# Altium PCB Notecarier-F.PcbDoc (part 3 of 3)
Units mm, origin at the board's own origin, x right, y up, seen from the top; angles counter-clockwise.
Board outline 50.8 x 103 mm, 4 copper layers (Top Layer, Mid Layer 3, Mid Layer 4, Bottom Layer), stack 1.58 mm thick; 102 components, 110 nets, 555 pads, 589 vias.
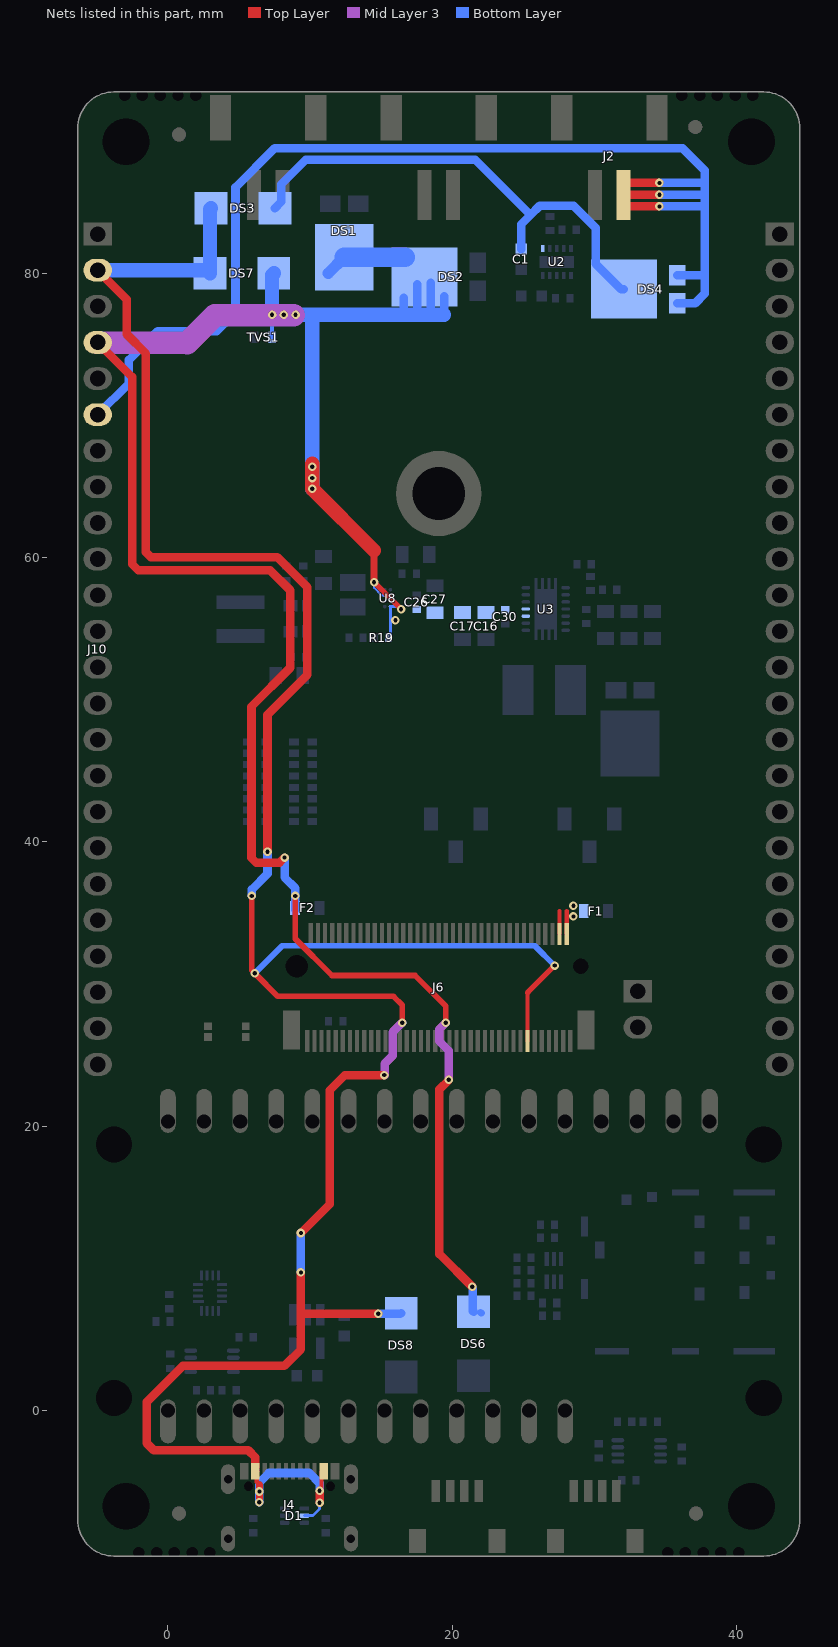
[diagram p5: the nets of this part, all layers, seen from the top]

## Via types
v1: diameter 0.6, hole 0.3, Top Layer to Bottom Layer, tented both sides, 589 vias

## Nets (pads, with @x,y where several pads share a name; then routed paths per layer and width w, separated by ;. In a path a pad name is that pad's centre, name@x,y a point inside that pad or via, vN(x,y) a via of type N, cw(c..) or ccw(c..) an arc to the next point about the centre after c; other vN are vias at no path point) (continued)
VBUS: C1.2 DS3.1 DS4.3 U2.1 | length 35.2
  Bottom Layer w0.6: DS3.1@7.525,84.585 7.984,85.044 7.984,86.284 9.7,88 21.605,88 25.502,84.102 ; C1.2@24.845,81.71 24.845,83.445 25.502,84.102 ; DS4.3@32.075,78.885 31.875,78.885 30.1,80.66 30.1,83.2 28.54,84.76 26.16,84.76 25.502,84.102
VIO_P: F1.2 J6.2 J6.4 | length 3.2
  Top Layer w0.3: J6.4@27.55,33.535 27.55,35.135 ; J6.2@28.05,33.535 28.05,35.135
  other v1: 28.525,34.76 28.525,35.51
VMAIN: C16.2 C17.2 C26.2 C27.2 C30.2 DS1.3 DS2.3 DS6.1 DS7.1 F2.1 J10.4 R19.2 TVS1.2 U3.10 U3.11 U8.A2 U8.C1 | length 167.1
  Top Layer w0.4: v1(8.95,36.2) 8.95,33.185 11.535,30.6 17.385,30.6 19.55,28.435 v1(19.55,27.285) ; v1(14.5,58.275) v1(16.4,56.375)
  Top Layer w0.5: v1(14.5,58.275) 14.5,60.5
  Top Layer w0.6: J10.4@-4.95,75.14 -2.525,72.715 -2.525,59.55 -2.075,59.1 7.2,59.1 8.6,57.7 8.6,52.25 5.875,49.525 5.875,38.875 6.2,38.55 7.85,38.55 v1(8.2,38.9) ; v1(19.76,23.26) 19.095,22.595 19.095,11.005 v1(21.4,8.7)
  Top Layer w1: v1@10.15,66.6 v1(10.15,64.85) 14.5,60.5
  Mid Layer 3 w0.6: v1(19.55,27.285) 19.1,26.835 19.1,25.96 19.76,25.3 v1(19.76,23.26)
  Mid Layer 3 w1.6: J10.4@-4.95,75.14 1.356,75.105 3.299,77.048 v1@8.85,77.048
  Bottom Layer w0.15: v1(14.5,58.275) 14.5,57.875 15.025,57.35 U8.C1@15.25,57.35
  Bottom Layer w0.2: R19.2@15.65,54.5 U8.A2@15.65,56.55 v1@16.45,56.55
  Bottom Layer w0.3: TVS1.2@7.325,75.5 v1(7.325,77.08)
  Bottom Layer w0.5: v1(8.15,77.08) 8.15,77.053 v1@8.225,76.978 ; DS6.1@21.995,6.9 DS6.1@22.035,6.86
  Bottom Layer w0.6: v1(8.2,38.9) 8.2,37.5 8.95,36.75 F2.1@8.95,35.235 ; 16.575,77.08 DS2.3@16.575,78.285 ; 17.525,77.08 DS2.3@17.525,79.235 ; 18.475,77.08 DS2.3@18.475,79.335 ; 19.425,77.08 DS2.3@19.425,78.385 ; v1(21.4,8.7) 21.451,8.649 21.451,6.999 DS6.1@21.5,6.95
  Bottom Layer w0.8: DS1.3@11.265,80 DS1.3@12.4,81.135
  Bottom Layer w1: v1(7.325,77.08) 7.325,79.875 DS7.1@7.45,80 ; v1@7.45,77.08 v1(8.15,77.08) v1(8.975,77.08) 10.15,77.08 v1(10.15,64.85) ; 10.3,77.08 15.4,77.08 19.425,77.08
  Bottom Layer w1.4: DS1.3@12.4,81.135 DS2.3@16.675,81.135
  other v1: 16,55.6 10.15,65.6 10.15,66.4
VSOLAR: DS4.1 DS4.2 J2.2 J10.6 | length 86.9
  Top Layer w0.6: J2.2@32.075,84.71 v1(34.575,84.71) ; J2.2@32.075,85.535 v1(34.575,85.535) ; J2.2@32.075,86.36 v1(34.575,86.36)
  Bottom Layer w0.6: J10.6@-4.95,70.06 -2.75,72.26 -2.75,73.91 -0.725,75.935 3.425,75.935 4.75,77.26 4.75,86.05 7.5,88.8 36.2,88.8 37.75,87.25 37.75,86.393 ; v1(34.575,84.71) 37.75,84.71 ; v1(34.575,85.535) 37.675,85.535 ; v1(34.575,86.36) 37.718,86.36 37.75,86.393 ; DS4.1@35.825,77.9 37.09,77.9 37.75,78.56 37.75,86.393 ; DS4.2@35.825,79.87 37.64,79.87
VUSB: D1.5 DS3.2 DS7.2 DS8.1 J4.A4 J4.A9 J4.B4 J4.B9 J6.13 J10.2 | length 187.9
  Top Layer w0.3: J4.B9@6.3,-4.267 6.243,-4.324 6.243,-5.032 6.425,-5.214 6.425,-5.224 ; v1(10.665,-5.654) 10.8,-5.519 J4.B4@10.8,-4.267 ; J6.13@25.3,25.985 25.3,29.397
  Top Layer w0.4: v1(5.9,36.2) 5.9,30.96 v1(6.1,30.76) 7.725,29.135 15.865,29.135 16.475,28.525 v1(16.475,27.285) ; 25.3,29.397 v1(27.203,31.3)
  Top Layer w0.5: v1@6.435,-6.44 v1(6.435,-5.7) 6.435,-5.224
  Top Layer w0.6: J10.2@-4.95,80.22 -2.9,78.17 -2.9,75.71 -1.55,74.36 -1.55,60.375 -1.2,60.025 7.7,60.025 9.8,57.925 9.8,51.75 7,48.95 v1(7,39.3) ; J4.A4@6.15,-4 6.15,-3.3 5.65,-2.8 -1,-2.8 -1.5,-2.3 -1.5,0.6 1.035,3.135 8.185,3.135 9.35,4.3 9.35,6.8 ; v1(9.35,9.71) 9.35,6.8 ; v1(9.35,12.485) 11.365,14.5 11.365,22.515 12.45,23.6 v1(15.213,23.6) ; v1(10.665,-6.5) v1(10.665,-5.654) ; v1(14.8,6.8) 9.35,6.8
  Mid Layer 3 w0.6: v1(15.213,23.6) 15.25,23.6 15.25,24.4 15.8,24.95 15.8,26.61 v1(16.475,27.285)
  Bottom Layer w0.2: D1.5@9.6,-7.4 10.2,-7.4 10.658,-6.942 10.658,-6.507 v1(10.665,-6.5)
  Bottom Layer w0.4: v1(6.1,30.76) 8.04,32.7 25.803,32.7 v1(27.203,31.3)
  Bottom Layer w0.6: v1(5.9,36.2) 5.9,36.66 7,37.76 v1(7,39.3) ; v1@6.435,-6.44 v1(6.435,-5.7) 6.435,-5.065 7.1,-4.4 9.95,-4.4 10.665,-5.115 v1(10.665,-5.654) ; v1(9.35,9.71) v1(9.35,12.485) ; v1(14.8,6.8) 16.35,6.8 DS8.1@16.4,6.85
  Bottom Layer w1: J10.2@-4.95,80.22 2.73,80.22 DS7.2@2.95,80 2.95,84.51 DS3.2@3.025,84.585
  other v1: 6.425,-6.45
pads on no net: FD1.1 FD2.1 FD3.1 FD4.1 FD5.1 FD6.1 FD7.1 FD8.1 J1.M J2.M J3.M J4.0 J4.A8 J4.B8 J5.6 J6. J6.1 J6.15 J6.17 J6.19 J6.21 J6.23 J6.24 J6.25 J6.26 J6.27 J6.28 J6.29 J6.30 J6.31 J6.35 J6.37 J6.44 J6.53 J6.55 J6.59 J6.61 J6.63 J6.66 J6.68 J6.69 J6.75 J6.AH J7.M J8.M SW1.3 U2.9 U3.14 U8.D2 U9.4

## Polygon pours and split planes (outlines as drawn)
GND on Top Layer "Top Layer-GND" (solid, remove dead copper, pour order 38): -6.35,-10.24 44.45,-10.24 44.45,64.5 -6.35,64.5
VUSB on Top Layer "VUSB" (solid, remove dead copper, pour order 37): 5.852,-4.841 6.15,-5.089 6.15,-5.74 6.65,-5.74 6.85,-5.74 6.85,-5.04 6.55,-5.04 6.4,-4.74
GND on Bottom Layer "Bottom Layer-GND" (solid, remove dead copper, pour order 39): -6.35,-10.24 44.45,-10.24 44.45,64.5 -6.35,64.5
GND on Mid Layer 4 "Mid Layer 4-GND" (solid, remove dead copper, pour order 41): -6.35,-10.24 44.45,-10.24 44.45,92.76 -6.35,92.76
GND on Mid Layer 3 "Mid Layer 3-GND" (solid, remove dead copper, pour order 40): -6.35,-10.24 44.45,-10.24 44.45,92.76 -6.35,92.76

## Keep-outs
Keep-Out Layer:
  circle w0.2: c41.05,-6.74 r1.9
  circle w0.2: c-2.95,-6.74 r1.9
  circle w0.2: c-3.804,0.876 r1.5
  circle w0.2: c41.05,89.26 r1.9
  circle w0.2: c-2.95,89.26 r1.9
  circle w0.2: c41.916,18.72 r1.5
  circle w0.2: c41.916,0.876 r1.5
  circle w0.2: c-3.81,18.72 r1.5
  circle w0.2: c9.05,31.26 r0.8
  circle w0.2: c29.05,31.26 r0.55
  lines w0.2: -6.35,-7.7 ccw(c-3.81,-7.7) -3.81,-10.24 41.91,-10.24 ccw(c41.91,-7.7) 44.45,-7.7 44.45,90.22 ccw(c41.91,90.22) 41.91,92.76 -3.81,92.76 ccw(c-3.81,90.22) -6.35,90.22 -6.35,-7.7

## Other copper
Top Layer:
  region net VIO_P: 28.825,35.81 27.353,35.81 27.353,34.46 28.825,34.46
Bottom Layer:
  rectangle net NetF2_2: 10.3,35.585 10.975,36.435
  region net VIO_P: 29.725,35.81 28.225,35.81 28.225,34.46 29.725,34.46
  region net 1V8: 13.3,58.8 10.525,58.8 10.525,57.675 13.3,57.675
  rectangle net F_BAT: 31.5,43.035 33.6,45.585
  rectangle net NetC22_1: 31,51.585 35.9,52.485
  region net VBUS: 26.3,81.6 26.3,81.9 25.1,81.9 25.1,81.6
  pour cut-out: 13.9,58.8 12.1,58.8 12.1,55.95 13.9,55.95
  pour cut-out: 23.662,48.685 29.487,48.685 29.487,52.385 23.662,52.385
  region net VMAIN: 25.475,56.535 23.65,56.535 23.25,56.95 18.9,56.95 18.675,56.725 18.675,55.16 21.675,55.16 22.275,55.76 25.475,55.76
  region net GND: 25.885,54.96 27.265,54.96 27.265,54.305 27.775,53.795 27.775,52.71 25.375,52.71 25.375,53.795 25.885,54.305
  region net NetL2_2: 25.525,55.56 25.525,54.36 25.075,53.91 25.075,48.96 23.425,48.96 23.425,54.585 23.575,54.735 24.2,54.735 24.4,54.935 24.4,55.56
  region net NetL2_1: 27.625,55.56 27.625,54.36 28.075,53.91 28.075,48.96 29.575,48.96 29.575,54.735 28.95,54.735 28.75,54.935 28.75,55.56
  region net NetC22_1: 27.675,56.535 28.46,56.535 29.059,57.134 35.9,57.1 35.9,52.41 35.05,52.41 35.05,55.185 30.45,55.185 29.85,55.785 27.675,55.785
  region net VMAIN: 15.55,54.93 15.55,56.1 15.85,56.1 16.075,56.325 16.075,56.725 19.675,56.725 19.675,55.16 19.445,54.93
  region net NetL3_2: 12.1,54.975 12.1,57.1 13.9,57.1 13.9,56.625 14.8,56.625 14.8,56.381 15.081,56.1 15.35,56.1 15.35,54.975
  region net 1V8: 12.1,57.675 12.1,59.105 12.475,59.48 12.475,60.825 16.975,60.825 16.975,59.395 16.605,59.025 14.275,59.025 13.9,58.65 13.9,57.675
  region net NetL1_1: 3.037,55 6.525,55 7.125,55.6 7.8,55.6 7.8,54.1 7.35,53.65 3.037,53.65
  region net 1V8: 3.037,56.35 6.525,56.35 7.1,55.775 7.8,55.775 7.8,57.7 3.037,57.7
  region net GND: 9.15,52.675 9.15,54.1 8.1,54.1 7.425,53.425 6.375,53.425 6.375,52.675
  region net 1V8: 11.725,57.625 11.725,59.125 10.425,59.125 9.975,58.675 8.775,58.675 8.775,57.625
  region net N_VIO: 11.725,57.325 10.07,57.325 10.07,54.27 9.9,54.1 9.3,54.1 9.3,52.413 9.3,49.1 11.725,49.1
  pour cut-out: 6.725,57.475 2.825,57.475 2.825,53.875 6.725,53.875
Multi-Layer:
  pour cut-out: 19.05,64.535 19.05,92.76 44.45,92.76 44.45,64.535

## Silkscreen, mask and mechanical layers (free items; w line width, h text height)
Top Overlay:
  drawing of 7 lines, arcs and shapes, not listed
  text "+" at 9.35,84.86 h3 r270
  text "+" at 21.35,84.86 h3 r270
  text "+" at 33.35,84.86 h3 r270
  text "-" at 3.35,83.46 h3
  text "-" at 15.35,83.46 h3
  text "-" at 27.35,83.46 h3
  text "F_3V3" at -3.125,82.235 h2.29
  text "F_NRST" at 35.402,82.192 h2.29
  text "V+" at 3.475,81.675 h2.29
  text "VBAT" at 15.4,81.675 h2.29
  text "SOLAR" at 27.475,81.675 h2.29
  text "VUSB" at -3.098,79.662 h2.29
  text "F_EN" at 37.45,79.62 h2.29
  text "SDA" at 38.075,77.08 h2.29
  text "VBAT" at -3.098,77.048 h2.29
  text "NOTECARRIER-F" at 8.275,76.225 h4
  text "VMAIN" at -3.098,74.508 h2.29
  text "SCL" at 38.275,74.455 h2.29
  text "V1.5" at 16.517,74.066 h4
  text "F_D5" at 37.598,72.038 h2.29
  text "N_VIO" at -3.098,71.969 h2.29
  text "F_D6" at 37.601,69.491 h2.29
  text "VSOLAR" at -3.1,69.429 h2.29
  text "F_D9" at 37.628,66.953 h2.29
  text "V+" at -3.098,66.888 h2.29
  text "F_D10" at 36.974,64.414 h2.29
  text "GND" at -3.125,64.385 h2.29
  text "F_D11" at 37.352,61.873 h2.29
  text "N_EN" at -3.098,61.818 h2.29
  text "F_D12" at 36.98,59.325 h2.29
  text "N_NRST" at -3.098,59.302 h2.29
  text "F_D13" at 37.019,56.799 h2.29
  text "N_BOOT" at -3.098,56.764 h2.29
  text "F_B0" at 37.566,54.254 h2.29
  text "N_SCL" at -3.098,54.222 h2.29
  text "F_TX" at 37.495,51.713 h2.29
  text "N_SDA" at -3.098,51.682 h2.29
  text "F_RX" at 37.446,49.173 h2.29
  text "N_ATTN" at -3.098,49.143 h2.29
  text "F_MISO" at 35.88,46.644 h2.29
  text "AUX_EN" at -3.1,46.609 h2.29
  text "F_MOSI" at 35.904,44.094 h2.29
  text "AUX_RX" at -3.1,44.069 h2.29
  text "F_SCK" at 36.444,41.552 h2.29
  text "AUX_TX" at -3.1,41.529 h2.29
  text "F_A5" at 37.509,39.018 h2.29
  text "AUX1" at -3.1,38.989 h2.29
  text "F_A4" at 37.422,36.473 h2.29
  text "AUX2" at -3.1,36.442 h2.29
  text "F_A3" at 37.525,33.939 h2.29
  text "AUX3" at -3.1,33.909 h2.29
  text "AUX4" at -3.1,31.369 h2.29
  text "F_A2" at 37.487,31.385 h2.29
  text "RTX" at 31.7,30.985 h1.8
  text "F_A1" at 37.858,28.853 h2.29
  text "N_RX" at -3.098,28.823 h2.29
  text "F_A0" at 37.48,26.314 h2.29
  text "N_TX" at -3.098,26.283 h2.29
  text "CTX" at 31.7,24.085 h1.8
  text "F_AREF" at 35.429,23.773 h2.29
  text "GND" at -3.125,23.735 h2.29
  text "N_NRST" at 1.5,23.66 h1.8
  text "F_B0" at -0.691,17.92 h2.29 r270
  text "F_TX" at 1.849,17.92 h2.29 r270
  text "F_RX" at 4.398,17.92 h2.29 r270
  text "F_MISO" at 6.929,17.92 h2.29 r270
  text "F_MOSI" at 9.469,17.92 h2.29 r270
  text "F_SCK" at 12.009,17.92 h2.29 r270
  text "F_A5" at 14.549,17.92 h2.29 r270
  text "F_A4" at 17.089,17.92 h2.29 r270
  text "F_A3" at 19.629,17.92 h2.29 r270
  text "F_A2" at 22.169,17.92 h2.29 r270
  text "F_A1" at 24.709,17.92 h2.29 r270
  text "F_A0" at 27.249,17.92 h2.29 r270
  text "GND" at 29.789,17.92 h2.29 r270
  text "F_AREF" at 32.338,17.92 h2.29 r270
  text "F_3V3" at 34.869,17.92 h2.29 r270
  text "F_NRST" at 37.418,17.92 h2.29 r270
  text "F_SDA" at -0.691,8.069 h2.29 r270
  text "F_SCL" at 1.849,7.067 h2.29 r270
  text "F_BAT" at 27.258,7.02 h2.29 r270
  text "F_D5" at 4.389,6.839 h2.29 r270
  text "F_D10" at 12.009,6.728 h2.29 r270
  text "F_D11" at 14.549,6.728 h2.29 r270
  text "F_D13" at 19.629,6.729 h2.29 r270
  text "VUSB" at 22.169,6.729 h2.29 r270
  text "F_D12" at 17.089,6.723 h2.29 r270
  text "F_EN" at 24.718,6.569 h2.29 r270
  text "F_D6" at 6.929,5.656 h2.29 r270
  text "F_D9" at 9.469,5.656 h2.29 r270
  text "NOTECARD USB" at -5.1,-4.325 h1.6
  text "QWIIC" at 18.65,-4.34 h1.6
  text "QWIIC" at 28.35,-4.34 h1.6
Bottom Overlay:
  lines w0.2: 34.525,25.685 31.525,25.685 31.525,30.785 34.525,30.785 ; 34.575,25.685 34.575,30.785
  text "V+" at 11.091,89.25 h2
  text "VBAT" at 23.056,89.25 h2
  text "SOLAR" at 34.594,89.25 h2
  text "2.5V - 5.5V" at 11.091,87.375 h2
  text "3.3V - 4.2V" at 23.056,87.375 h2
  text "3.5V - 7V" at 34.594,87.375 h2
  text "F_3V3" at 1.375,82.235 h2.29
  text "F_NRST" at 41.198,82.192 h2.29
  text "VUSB" at 0.925,79.635 h2.29
  text "F_EN" at 41.2,79.61 h2.29
  text "SDA" at 41.15,77.08 h2.29
  text "VBAT" at 1.001,77.048 h2.29
  text "VMAIN" at 1.682,74.508 h2.29
  text "SCL" at 41.125,74.455 h2.29
  text "F_D5" at 41.198,72.038 h2.29
  text "N_VIO" at 1.242,71.969 h2.29
  text "F_D6" at 41.198,69.491 h2.29
  text "VSOLAR" at 3.025,69.44 h2.29
  text "F_D9" at 41.198,66.953 h2.29
  text "V+" at -1.335,66.888 h2.29
  text "F_D10" at 41.198,64.414 h2.29
  text "GND" at -0.125,64.385 h2.29
  text "F_D11" at 41.198,61.873 h2.29
  text "N_EN" at 0.788,61.818 h2.29
  text "F_D12" at 41.198,59.325 h2.29
  text "N_NRST" at 2.875,59.302 h2.29
  text "F_D13" at 41.198,56.799 h2.29
  text "N_BOOT" at 2.853,56.764 h2.29
  text "F_B0" at 41.198,54.254 h2.29
  text "N_SCL" at 1.729,54.222 h2.29
  text "F_TX" at 41.198,51.713 h2.29
  text "N_SDA" at 1.912,51.682 h2.29
  text "F_RX" at 41.198,49.173 h2.29
  text "N_ATTN" at 2.899,49.143 h2.29
  text "F_MISO" at 41.198,46.634 h2.29
  text "AUX_EN" at 2.972,46.609 h2.29
  text "F_MOSI" at 41.198,44.094 h2.29
  text "AUX_RX" at 3.017,44.069 h2.29
  text "F_SCK" at 41.198,41.552 h2.29
  text "AUX_TX" at 2.967,41.529 h2.29
  text "F_A5" at 41.198,39.018 h2.29
  text "AUX1" at 0.599,38.989 h2.29
  text "N_ATTN" at 16.05,36.725 h1.6 r270
  text "FEATHER_EN" at 23.05,36.725 h1.2
  text "ON" at 23.204,36.725 h1.6 r270
  text "ACTIVE" at 25.45,36.725 h1.6 r270
  text "GPS ANT." at 32.45,36.725 h1.6
  text "PASSIVE" at 32.604,36.725 h1.6 r270
  text "F_A4" at 41.198,36.473 h2.29
  text "AUX2" at 0.97,36.442 h2.29
  text "F_A3" at 41.198,33.939 h2.29
  text "AUX3" at 0.932,33.909 h2.29
  text "AUX4" at 1.035,31.369 h2.29
  text "F_A2" at 41.198,31.385 h2.29
  text "RTX" at 34.4,30.985 h1.8
  text "F_A1" at 41.198,28.853 h2.29
  text "N_RX" at 0.832,28.823 h2.29
  text "F_A0" at 41.198,26.314 h2.29
  text "N_TX" at 0.783,26.283 h2.29
  text "CTX" at 34.4,24.11 h1.8
  text "F_AREF" at 41.198,23.773 h2.29
  text "GND" at -0.125,23.735 h2.29
  text "SIM" at 34.05,15.86 h3
Top Paste:
  rectangle: 31.3,83.51 32.8,87.26
  rectangle: 29.3,83.51 30.8,87.26
  rectangle: 19.3,83.51 20.8,87.26
  rectangle: 17.3,83.51 18.8,87.26
  rectangle: 7.3,83.51 8.8,87.26
  rectangle: 5.3,83.51 6.8,87.26
M4 Enclosure:
  lines w0.2: -3.3,92.76 ccw(c-3.3,93.76) -3.3,94.76 ; -2.3,-12.24 ccw(c-2.3,-11.24) -2.3,-10.24 ; 2.2,92.76 cw(c2.2,93.76) 2.2,94.76 ; 3.2,-12.24 cw(c3.2,-11.24) 3.2,-10.24 ; 34.9,-12.24 ccw(c34.9,-11.24) 34.9,-10.24 ; 35.9,92.76 ccw(c35.9,93.76) 35.9,94.76 ; 40.4,-12.24 cw(c40.4,-11.24) 40.4,-10.24 ; 41.4,92.76 cw(c41.4,93.76) 41.4,94.76 ; -8.35,-7.7 ccw(c-3.81,-7.7) -3.81,-12.24 41.91,-12.24 ccw(c41.91,-7.7) 46.45,-7.7 46.45,90.22 ccw(c41.91,90.22) 41.91,94.76 -3.81,94.76 ccw(c-3.81,90.22) -8.35,90.22 -8.35,-7.7 ; -6.35,-7.7 ccw(c-3.81,-7.7) -3.81,-10.24 41.91,-10.24 ccw(c41.91,-7.7) 44.45,-7.7 44.45,90.22 ccw(c41.91,90.22) 41.91,92.76 -3.81,92.76 ccw(c-3.81,90.22) -6.35,90.22 -6.35,-7.7
M11 Gerber Spec:
  drawing of 235 lines, arcs and shapes, not listed
  text "PCB requirements" at 121.805,115.525 h1
  text "List of Gerber files" at 165.205,115.525 h1
  text "Parameter" at 119.305,112.525 h1
  text "Value" at 138.405,112.525 h1
  text "File" at 158.105,112.525 h1
  text "No." at 151.805,111.525 h1
  text "Description" at 170.605,111.525 h1
  text "Generated" at 187.205,111.525 h1
  text "extension" at 155.805,110.425 h1
  text "Material" at 108.405,109.525 h1
  text "FR-4 (Tg 140)" at 131.405,109.525 h1
  text "Number of layers" at 108.405,106.525 h1
  text "4" at 131.405,106.525 h1
  text "1." at 152.005,106.525 h1
  text "GTP" at 158.705,106.525 h1
  text "Top Solder Paste" at 165.705,106.525 h1
  text "Board thickness" at 108.405,103.525 h1
  text "1.6 (±0.1) mm" at 131.405,103.525 h2.2
  text "2." at 152.005,103.525 h1
  text "GTO" at 158.705,103.525 h1
  text "Top Overlay (Silk)" at 165.705,103.525 h1
  text "Solder mask" at 108.405,100.525 h1
  text "Black" at 131.405,100.525 h1
  text "3." at 152.205,100.525 h1
  text "GTS" at 158.705,100.525 h1
  text "Top Solder Mask" at 165.705,100.525 h1
  text "HAL (with lead)" at 134.705,97.525 h1
  text "4." at 152.205,97.525 h1
  text "GTL" at 158.705,97.525 h1
  text "Top Layer" at 165.705,97.525 h1
  text "Surface finishing" at 108.405,94.525 h1
  text "HAL (lead-free)" at 134.705,94.525 h1
  text "5." at 152.205,94.525 h1
  text "G1" at 158.705,94.525 h1
  text "Mid Layer 1" at 165.705,94.525 h1
  text "ENIG" at 134.705,91.525 h1
  text "6." at 152.205,91.525 h1
  text "G2" at 158.705,91.525 h1
  text "Mid Layer 2" at 165.705,91.525 h1
  text "other:" at 134.705,88.525 h1
  text "7." at 152.205,88.525 h1
  text "GBL" at 158.705,88.525 h1
  text "Bottom Layer" at 165.705,88.525 h1
  text "Silkscreen top" at 108.405,85.525 h1
  text "White" at 131.405,85.525 h1
  text "8." at 152.205,85.525 h1
  text "GBS" at 158.705,85.525 h1
  text "Bottom Solder Mask" at 165.705,85.525 h1
  text "Silkscreen bottom" at 108.405,82.525 h1
  text "White" at 131.405,82.525 h1
  text "9." at 152.205,82.525 h1
  text "GBO" at 158.705,82.525 h1
  text "Bottom Overlay (Silk)" at 165.705,82.525 h1
  text "Min. track/spacing" at 108.405,79.525 h1
  text "0.15 mm" at 131.405,79.525 h1
  text "10." at 152.205,79.525 h1
  text "GBP" at 158.705,79.525 h1
  text "Bottom Solder Paste" at 165.705,79.525 h1
  text "Min. hole size" at 108.405,76.525 h1
  text "0.3 mm" at 131.405,76.525 h1
  text "11." at 152.205,76.525 h1
  text "GM10" at 158.705,76.525 h1
  text "Bottom PSM" at 165.705,76.525 h1
  text "Board dimension" at 108.405,73.525 h1
  text "103x50.8 (±0.2) mm" at 131.405,73.525 h2.2
  text "12." at 152.205,73.525 h1
  text "GM15" at 158.705,73.525 h1
  text "Board Layer" at 165.705,73.525 h1
  text "Panelization" at 108.405,70.525 h1
  text "No" at 131.405,70.525 h1
  text "13." at 152.205,70.525 h1
  text "GM8" at 158.705,70.525 h1
  text "Milling" at 165.705,70.525 h1
  text "RoHS compatibility" at 108.405,67.525 h1
  text "Yes" at 131.405,67.525 h1
  text "14." at 152.205,67.525 h1
  text "GM9" at 158.705,67.525 h1
  text "V-Cut" at 165.705,67.525 h1
  text "Number of Gerber Files" at 108.405,64.525 h1
  text "15" at 131.405,64.525 h1
  text "15." at 152.205,64.525 h1
  text "TXT" at 158.705,64.525 h1
  text "Round holes" at 165.705,64.525 h1
  text "16." at 152.205,61.525 h1
  text "TXT" at 158.705,61.525 h1
  text "Slot holes" at 165.705,61.525 h1
  text "17." at 152.205,58.525 h1
  text "TX1" at 158.705,58.525 h1
  text "Round holes" at 165.705,58.525 h1
  text "18." at 152.205,55.525 h1
  text "DRR" at 158.705,55.525 h1
  text "NCDrill file report" at 165.705,55.525 h1
  text "19." at 152.205,52.525 h1
  text "GM11" at 158.705,52.525 h1
  text "Gerbers Specification" at 165.705,52.525 h1
  text "20." at 152.205,49.525 h1
  text "GM16" at 158.705,49.525 h1
  text "Sheet Top" at 165.705,49.525 h1
  text "Additional requests" at 118.405,37.075 h1
  text "Via in pad" at 127.405,34.075 h1
  text "Half holes/castellated edges" at 127.405,31.075 h1
  text "Plated edge" at 127.405,28.075 h1
  text "Impedance control" at 127.405,25.075 h1
  text "Blind vias" at 127.405,22.075 h1
  text "Other:" at 127.405,17.575 h1
  text "Layer stack up details" at 141.005,5.875 h1
  text "Copper" at 139.405,2.875 h1
  text "Dielectric" at 149.205,2.875 h1
  text "Dielectric" at 162.205,2.875 h1
  text "Dielectric" at 174.505,2.875 h1
  text "Layer name" at 121.405,1.875 h1
  text "thickness" at 137.705,0.475 h1
  text "height" at 151.005,0.475 h1
  text "material" at 163.105,0.475 h1
  text "type" at 177.405,0.475 h1
  text "Top Layer (GTL)" at 118.405,-6.125 h1
  text "0.035 mm" at 138.205,-6.125 h1
  text "0.1 mm" at 150.905,-9.125 h1
  text "FR-4" at 164.005,-9.125 h1
  text "Prepreg" at 176.005,-9.125 h1
  text "Mid Layer 1 (G1)" at 118.405,-12.125 h1
  text "0.0175 mm" at 138.205,-12.125 h1
  text "1.265 mm" at 150.905,-15.125 h1
  text "FR-4" at 164.005,-15.125 h1
  text "Core" at 176.005,-15.125 h1
  text "Mid Layer 2 (G2)" at 118.405,-18.125 h1
  text "0.0175 mm" at 138.205,-18.125 h1
  text "0.1 mm" at 150.905,-21.125 h1
  text "FR-4" at 164.005,-21.125 h1
  text "Prepreg" at 176.005,-21.125 h1
  text "Bottom Layer (GBL)" at 118.405,-24.125 h1
  text "0.035 mm" at 138.205,-24.125 h1
  text "Gerber specification" at 137.4,-40.025 h1.52
  text "PART NO.:" at 123.52,-50.67 h1.14
  text ".PCB_Num" at 136.9,-51.775 h1.52
M13 Assy Top Comm:
  text "Assembly drawing comments - TOP" at 137.4,-39.925 h1.52
  text "BOM NO.:" at 123.52,-50.67 h1.14
  text ".PCBA_BOM_Num" at 136.9,-51.775 h1.52
M14 Assy Bot Comm:
  text "Assembly drawing comments - BOTTOM" at -22.475,-40.015 h1.52
  text ".PCBA_BOM_Num" at -21.975,-51.765 h1.52
M15 Board Outline:
  the board outline again, w0.2
M16 Sheet Top:
  drawing of 42 lines, arcs and shapes, not listed
  text "1" at -52.354,121.146 h1.78
  text "2" at 20.29,121.146 h1.78
  text "3" at 93.442,121.146 h1.78
  text "4" at 166.34,121.146 h1.78
  text "This document is the exclusive property of Byte Lab Grupa d.o.o. Company and it should not be distributed or" at -81.738,116.193 h1.52
  text "reproduced into any other format without prior permission from Byte Lab Grupa d.o.o." at -81.357,112.764 h1.52
  text "A" at -86.695,98.134 h1.78
  text "A" at 200.325,98.134 h1.78
  text "B" at -86.695,50.077 h1.78
  text "B" at 200.325,50.077 h1.78
  text "C" at -86.695,1.563 h1.78
  text "C" at 200.23,1.563 h1.78
  text "SIGNATURE" at 99.125,-35.265 h1.14
  text "TITLE:" at 123.495,-35.455 h1.14
  text "AUTHOR:" at 85.125,-39.365 h1.14
  text ".PCB_Author" at 99.125,-39.408 h1.52
  text "ACCEPTOR:" at 85.125,-44.315 h1.14
  text ".PCB_Acceptor" at 99.125,-44.315 h1.52
  text "D" at -86.695,-46.443 h1.78
  text "D" at 200.23,-46.443 h1.78
  text "Byte Lab Grupa d.o.o." at 58.975,-53.935 h1.65
  text "Medarska 69/1" at 58.975,-56.475 h1.65
  text "FORMAT:" at 176.835,-58.315 h1.14
  text "10000 Zagreb" at 58.975,-59.015 h1.65
  text "DESIGN DOCUMENT / NAME:" at 85.268,-59.942 h1.14
  text "'.HW_E_Doc_Num' '.Module_Name' Rev. '.HW_E_Doc_Rev'" at 102.125,-60.265 h1.52
  text "A4" at 185.375,-60.515 h1.52
  text "Croatia" at 58.975,-61.555 h1.65
  text "1" at -52.354,-66.814 h1.78
  text "2" at 20.29,-66.814 h1.78
  text "3" at 93.442,-66.814 h1.78
  text "4" at 166.34,-66.814 h1.78
Drill Drawing:
  circle w0.254: c-85.768,174.387 r0.733
  lines w0.254: -86.501,140.662 -85.768,141.028 -85.034,140.662 -85.401,141.395 -85.034,142.128 -85.768,141.761 -86.501,142.128 -86.134,141.395 -86.501,140.662 ; -86.501,145.427 -85.034,145.427 -85.768,143.961 -86.501,145.427 ; -86.501,150.926 -86.134,150.926 -86.134,150.559 -85.401,150.559 -85.401,150.926 -85.034,150.926 -85.034,151.659 -85.401,151.659 -85.401,152.026 -86.134,152.026 -86.134,151.659 -86.501,151.659 -86.501,150.926 ; -86.501,157.158 -86.501,157.524 -86.134,157.891 -86.501,158.257 -86.501,158.624 -86.134,158.624 -85.768,158.257 -85.401,158.624 -85.034,158.624 -85.034,158.257 -85.401,157.891 -85.034,157.524 -85.034,157.158 -85.401,157.158 -85.768,157.524 -86.134,157.158 -86.501,157.158 ; -86.501,160.823 -86.134,160.823 -85.768,160.457 -85.401,160.823 -85.034,160.823 -85.401,161.19 -85.034,161.557 -85.401,161.557 -85.768,161.923 -86.134,161.557 -86.501,161.557 -86.134,161.19 -86.501,160.823 ; -86.501,164.123 -86.134,164.123 -86.134,163.756 -85.401,163.756 -85.401,164.123 -85.034,164.123 -85.034,164.856 -85.401,164.856 -85.401,165.222 -86.134,165.222 -86.134,164.856 -86.501,164.856 -86.501,164.123 ; -86.501,167.055 -85.034,167.055 -85.034,168.522 -86.501,168.522 -86.501,167.055 ; -86.501,170.354 -85.768,170.721 -85.034,170.354 -85.401,171.088 -85.034,171.821 -85.768,171.454 -86.501,171.821 -86.134,171.088 -86.501,170.354 ; -86.208,140.955 -85.768,141.175 -85.328,140.955 -85.548,141.395 -85.328,141.835 -85.768,141.615 -86.208,141.835 -85.988,141.395 -86.208,140.955 ; -86.208,151.072 -85.988,151.072 -85.988,150.852 -85.548,150.852 -85.548,151.072 -85.328,151.072 -85.328,151.512 -85.548,151.512 -85.548,151.732 -85.988,151.732 -85.988,151.512 -86.208,151.512 -86.208,151.072 ; -86.208,157.451 -86.208,157.671 -85.988,157.891 -86.208,158.111 -86.208,158.331 -85.988,158.331 -85.768,158.111 -85.548,158.331 -85.328,158.331 -85.328,158.111 -85.548,157.891 -85.328,157.671 -85.328,157.451 -85.548,157.451 -85.768,157.671 -85.988,157.451 -86.208,157.451
  lines w0.381: -87.827,136.373 -8.511,136.373 ; -87.827,175.963 -8.511,175.963 ; -75.601,133.073 -75.601,179.262 ; -62.34,133.073 -62.34,179.262 ; -36.985,133.073 -36.985,179.262 ; -25.75,133.073 -25.75,179.262 ; -87.827,133.073 -8.511,133.073 -8.511,179.262 -87.827,179.262 -87.827,133.073
  text "Symbol" at -85.847,176.953 h1.58
  text "Count" at -74.611,176.953 h1.58
  text "Hole Size" at -61.35,176.953 h1.58
  text "Plated" at -35.995,176.953 h1.58
  text "Hole Type" at -24.76,176.953 h1.58
  text "589" at -74.611,173.654 h1.32
  text "0.300mm (11.81mil)" at -61.35,173.654 h1.32
  text "PTH" at -35.995,173.654 h1.32
  text "Round" at -24.76,173.654 h1.32
  text "2" at -74.611,170.354 h1.32
  text "0.600mm (23.62mil)" at -61.35,170.354 h1.32
  text "PTH" at -35.995,170.354 h1.32
  text "Slot" at -24.76,170.354 h1.32
  text "2" at -74.611,167.055 h1.32
  text "0.600mm (23.62mil)" at -61.35,167.055 h1.32
  text "PTH" at -35.995,167.055 h1.32
  text "Slot" at -24.76,167.055 h1.32
  text "2" at -74.611,163.756 h1.32
  text "0.650mm (25.59mil)" at -61.35,163.756 h1.32
  text "NPTH" at -35.995,163.756 h1.32
  text "Round" at -24.76,163.756 h1.32
  text "40" at -74.611,160.457 h1.32
  text "0.800mm (31.50mil)" at -61.35,160.457 h1.32
  text "NPTH" at -35.995,160.457 h1.32
  text "Round" at -24.76,160.457 h1.32
  text "28" at -74.611,157.158 h1.32
  text "1.000mm (39.37mil)" at -61.35,157.158 h1.32
  text "PTH" at -35.995,157.158 h1.32
  text "Round" at -24.76,157.158 h1.32
  text "1" at -74.611,153.858 h1.32
  text "1.100mm (43.31mil)" at -61.35,153.858 h1.32
  text "NPTH" at -35.995,153.858 h1.32
  text "Round" at -24.76,153.858 h1.32
  text "C" at -86.51,153.605 h1.47
  text "50" at -74.611,150.559 h1.32
  text "1.100mm (43.31mil)" at -61.35,150.559 h1.32
  text "PTH" at -35.995,150.559 h1.32
  text "Round" at -24.76,150.559 h1.32
  text "1" at -74.611,147.26 h1.32
  text "1.600mm (62.99mil)" at -61.35,147.26 h1.32
  text "NPTH" at -35.995,147.26 h1.32
  text "Round" at -24.76,147.26 h1.32
  text "D" at -86.51,147.006 h1.47
  text "4" at -74.611,143.961 h1.32
  text "2.540mm (100.00mil)" at -61.35,143.961 h1.32
  text "NPTH" at -35.995,143.961 h1.32
  text "Round" at -24.76,143.961 h1.32
  text "4" at -74.611,140.662 h1.32
  text "3.300mm (129.92mil)" at -61.35,140.662 h1.32
  text "NPTH" at -35.995,140.662 h1.32
  text "Round" at -24.76,140.662 h1.32
  text "1" at -74.611,137.362 h1.32
  text "3.700mm (145.67mil)" at -61.35,137.362 h1.32
  text "PTH" at -35.995,137.362 h1.32
  text "Round" at -24.76,137.362 h1.32
  text "A" at -86.51,137.109 h1.47
  text "724 Total" at -74.611,134.063 h1.32
  text "Slot definitions :" at -85.847,130.806 h1.32
  text "Routed Path Length" at -63.038,130.806 h1.32
  text "= Calculated from tool start centre position to tool end centre position." at -38.69,130.806 h1.32
  text "Hole Length" at -63.038,128.539 h1.32
  text "= Routed Path Length + Tool Size = Slot length as defined in the PCB layout" at -47.705,128.539 h1.32
M17 Sheet Bot:
  drawing of 42 lines, arcs and shapes, not listed
  text "4" at -51.44,121.146 h1.78
  text "3" at 21.458,121.146 h1.78
  text "2" at 94.61,121.146 h1.78
  text "1" at 167.254,121.146 h1.78
  text "This document is the exclusive property of Byte Lab Grupa d.o.o. Company and it should not be distributed or" at 196.638,116.193 h1.52
  text "reproduced into any other format without prior permission from Byte Lab Grupa d.o.o." at 196.257,112.764 h1.52
  text "A" at -85.425,98.134 h1.78
  text "A" at 201.595,98.134 h1.78
  text "B" at -85.425,50.077 h1.78
  text "B" at 201.595,50.077 h1.78
  text "C" at -85.425,1.563 h1.78
  text "C" at 201.595,1.563 h1.78
  text "SIGNATURE" at 15.775,-35.265 h1.14
  text "TITLE:" at -8.595,-35.455 h1.14
  text "AUTHOR:" at 29.775,-39.347 h1.14
  text ".PCB_Author" at 15.775,-39.408 h1.52
  text ".PCB_Acceptor" at 15.775,-44.297 h1.52
  text "ACCEPTOR:" at 29.775,-44.297 h1.14
  text "D" at -85.425,-46.443 h1.78
  text "D" at 201.595,-46.443 h1.78
  text "BOM NO.:" at -8.595,-50.695 h1.14
  text "Byte Lab Grupa d.o.o." at 55.925,-53.935 h1.65
  text "Medarska 69/1" at 55.925,-56.475 h1.65
  text "FORMAT:" at -61.935,-58.315 h1.14
  text "10000 Zagreb" at 55.925,-59.015 h1.65
  text "DESIGN DOCUMENT / NAME:" at 29.632,-59.942 h1.14
  text "'.HW_E_Doc_Num' '.Module_Name' Rev. '.HW_E_Doc_Rev'" at 12.775,-60.265 h1.52
  text "A4" at -70.475,-60.515 h1.52
  text "Croatia" at 55.925,-61.555 h1.65
  text "4" at -51.44,-66.814 h1.78
  text "3" at 21.458,-66.814 h1.78
  text "2" at 94.61,-66.814 h1.78
  text "1" at 167.254,-66.814 h1.78
M24 Assy Top Des:
  text "Assembly drawing designators - TOP" at 137.4,-39.925 h1.52
  text "BOM NO.:" at 123.52,-50.67 h1.14
  text ".PCBA_BOM_Num" at 136.9,-51.775 h1.52
M25 Assy Bot Des:
  text "Assembly drawing designators - BOTTOM" at -22.475,-40.015 h1.52
  text ".PCBA_BOM_Num" at -21.975,-51.765 h1.52

## Dimensions
-6.35,-7.7 to 44.45,-7.7 on M3 Dimensions
41.91,-10.24 to 41.91,92.76 on M3 Dimensions
-2.95,-6.74 to 41.05,-6.74 on M3 Dimensions
41.05,-6.74 to 41.05,89.26 on M3 Dimensions

## Text inside footprints (layer, text, board x,y; h text height)
DS1: M19 Sheet Bot Panel "3" at 12.4,81.055 h0.2 r180; M19 Sheet Bot Panel "1" at 13.385,84.805 h0.2 r90; M19 Sheet Bot Panel "2" at 11.415,84.805 h0.2 r90
DS2: M19 Sheet Bot Panel "2" at 21.72,80.745 h0.2; M19 Sheet Bot Panel "1" at 21.72,78.775 h0.2; M19 Sheet Bot Panel "3" at 17.97,79.76 h0.2 r90
DS4: M19 Sheet Bot Panel "2" at 35.745,79.87 h0.2; M19 Sheet Bot Panel "1" at 35.745,77.9 h0.2; M19 Sheet Bot Panel "3" at 31.995,78.885 h0.2 r90
DS5: M19 Sheet Bot Panel "2" at 31.515,50.58 h0.2 r90; M19 Sheet Bot Panel "1" at 33.485,50.58 h0.2 r90; M19 Sheet Bot Panel "3" at 32.5,46.83 h0.2 r180
J4: M1 Components Top "PCB edge" at 6.25,-11.317 h0.6
J5: M2 Components Bot "EDGE" at 42.975,3.96 h1 r90; M2 Components Bot "EDGE" at 42.975,18.99 h1 r90; M2 Components Bot "Only GND Trace" at 32.443,6.103 h0.3 r180
OBJ1: M19 Sheet Bot Panel "1" at 19.05,64.43 h0.2